# Altium PCB TS1A+继电器.PcbDoc
Units mm, origin at the board's own origin, x right, y up, seen from the top; angles counter-clockwise.
Board outline 54.36 x 30 mm, 2 copper layers (Top Layer, Bottom Layer); 34 components, 18 nets, 73 pads, 31 vias.
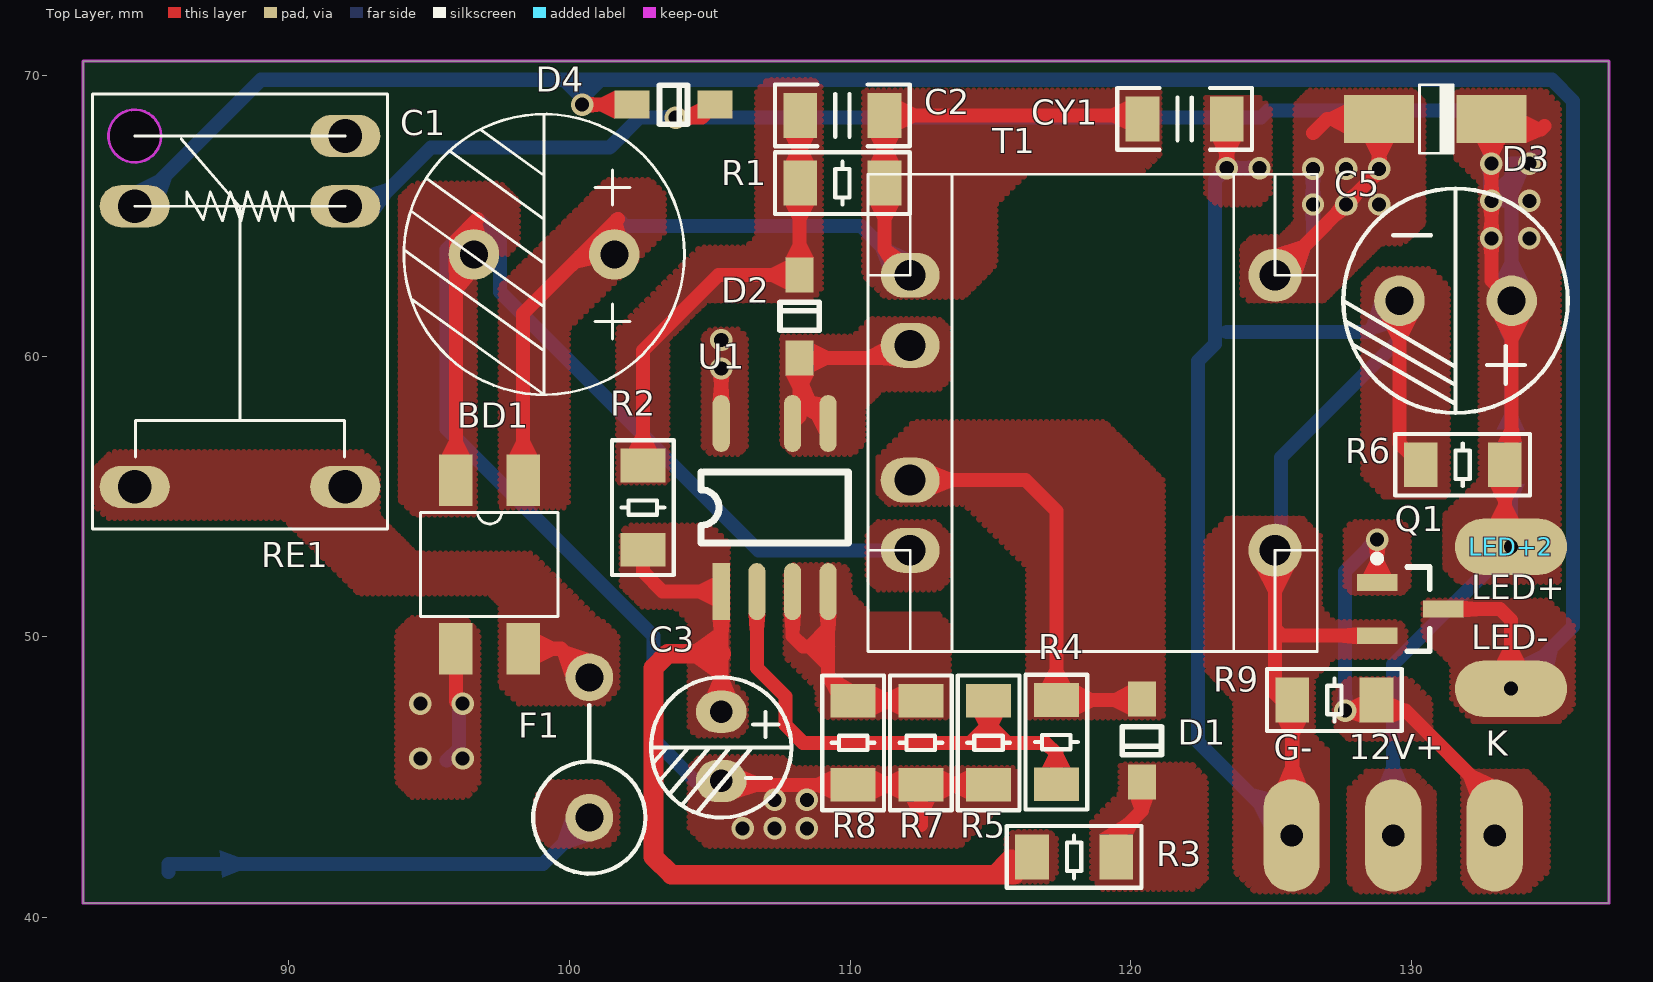
[diagram p0: Top Layer view]
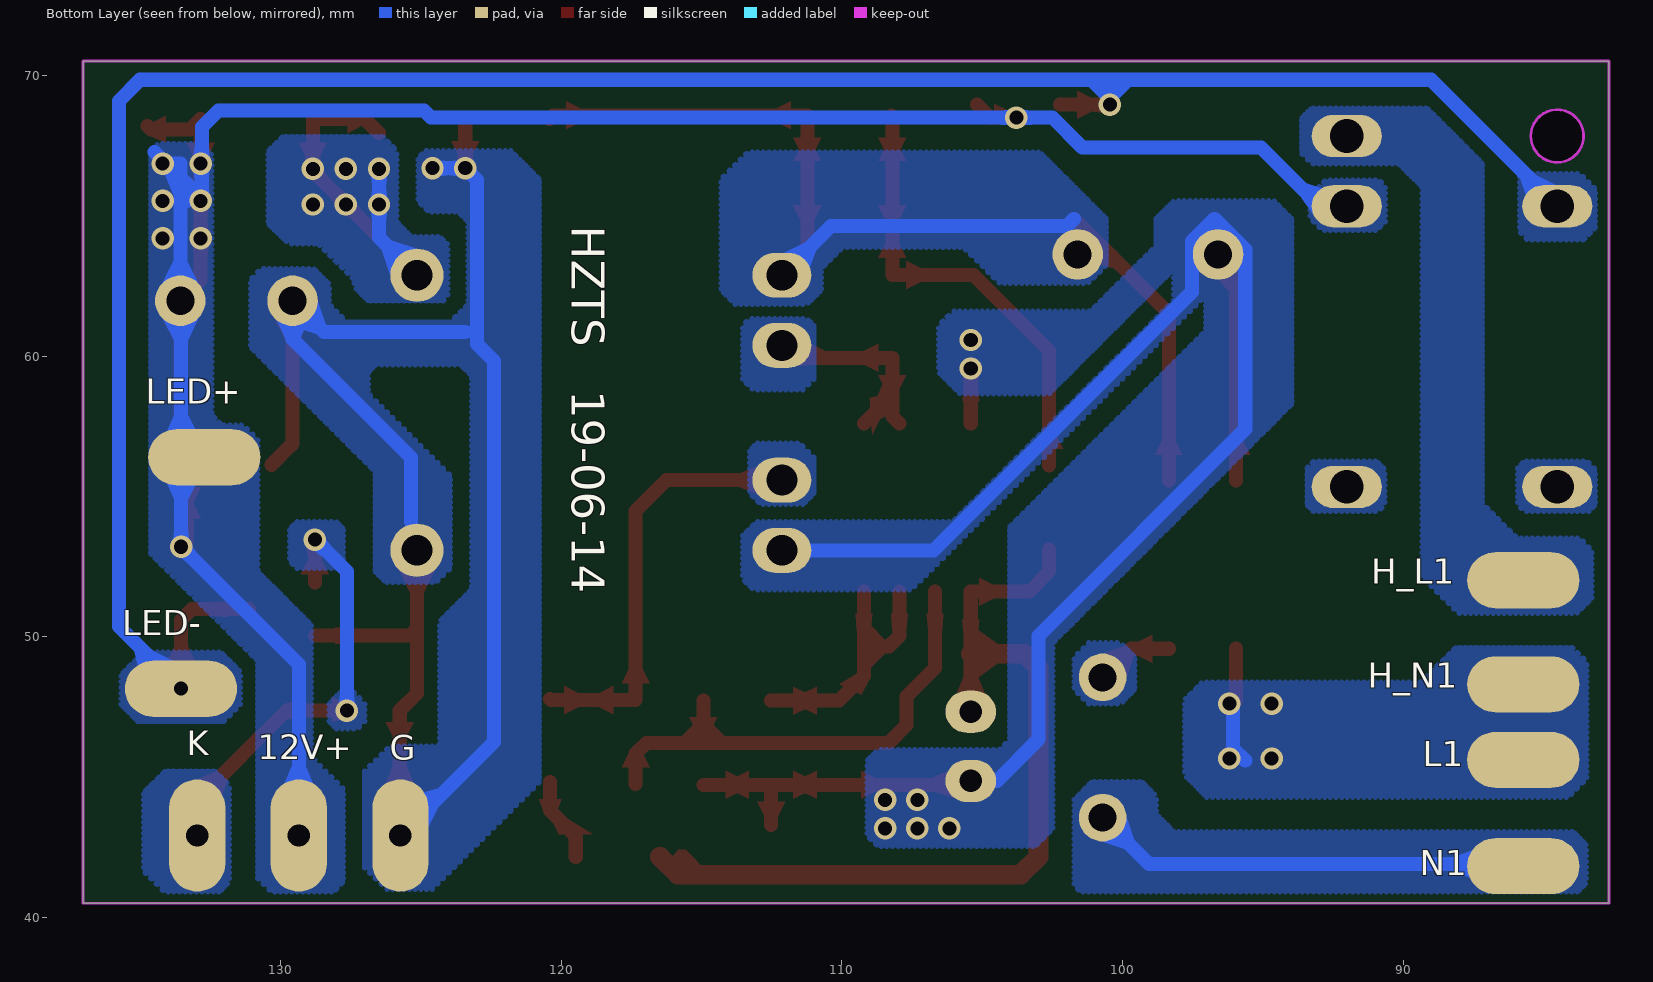
[diagram p1: Bottom Layer view, seen from below]

## Layer stack, top to bottom
Top Solder: solder mask 0.0102, Solder Resist, Dk 3.5
Top Layer: signal copper 0.0356
Dielectric 1: dielectric 0.32, FR-4, Dk 4.8
Bottom Layer: signal copper 0.0356
Bottom Solder: solder mask 0.0102, Solder Resist, Dk 3.5

## Board outline
82.677,40.513 82.677,70.513 137.033,70.513 137.033,40.513
cut-out: 83.578,67.845 ccw(c84.518,67.845) 84.518,66.905 ccw(c84.518,67.845) 85.458,67.845 ccw(c84.518,67.845) 84.518,68.785 ccw(c84.518,67.845)

## Design rules (kind name [scope] priority, off if disabled: settings)
Clearance [All] p1: gap=0.254 ignorepadtopadclearanceinfootprint=FALSE except(0: Arc-Hole Track-Hole SMDPad-Hole THPad-Hole Via-Hole Fill-Hole Poly-Hole Region-Hole Text-Hole)
PolygonConnect [All] p1: connectstyle=Direct reliefconductorwidth=0.254 reliefentries=4 polygonreliefangle="90 Angle" airgapwidth=0.254
RoutingVias [All] p1: holewidth=0.711 width=1.27 viastyle="Through Hole" minholewidth=0.711 minwidth=1.27 maxholewidth=0.711 maxwidth=1.27
SolderMaskExpansion [All] p1: expansion=0.102
Width [All] p1: maxlimit=1 minlimit=0.5 preferedwidth=0.5
30 further rules are at their usual default settings.

## Components (designator, comment, footprint, x,y, rotation, side; value= is the part's Value field where it differs from the comment)
12V+ "Welding-hole" PAD#1 129.35,42.926 r90 top
BD1 "Bridge2" MBL10S 97.155,52.578 r180 top
C1 "10uF/400V" "400V/10uF 直插电解电容" 101.6,63.627 r180 top value=?
C2 "Cap" C1206 109.728,68.58 r0 top value=?
C3 "10uF/50V" 50V/10uF 105.41,46.101 r0 top value=?
C5 "1000uF/16V" 16V/680uF 131.572,61.976 r180 top locked value=?
CY1 "Cap" C1206 121.92,68.453 r0 top value=?
D1 "Diode" SOD123 120.396,47.781 r90 top
D2 "Diode" SOD123 108.204,59.944 r270 top
D3 "SS310/SMA" SMA 132.849,68.453 r180 top
D4 "FR107" SOD123 102.235,68.961 r180 top
F1 "Fuse 1" FUSE 100.711,46.061 r90 top
G- "Welding-hole" PAD#1 125.73,42.926 r90 top
H_L1 "Welding-hole" PAD#2 85.725,52.019 r180 bottom
H_N1 "Welding-hole" PAD#2 85.725,48.311 r180 bottom
K "Welding-hole" PAD#1 132.969,42.926 r270 top (schematic designator LED_K1)
L1 "Welding-hole" PAD#2 85.725,45.618 r0 bottom
LED+ "Welding-hole" PAD#2 132.715,56.4 r180 bottom
LED+2 "Welding-hole" PAD#2 133.545,53.213 r180 top
LED- "Welding-hole" PAD#3 133.545,48.154 r180 bottom
N1 "Welding-hole" PAD#2 85.725,41.834 r180 bottom
Q1 "MOSFET-N" SOT_23_N-MOS 129.953,50.993 r270 top
R1 "120K/1206" R1206 109.728,66.167 r0 top value=1K
R2 "6.8mK/1206" R1206 102.616,54.61 r90 top value=1K
R3 "10R/1206" R1206 117.983,42.164 r0 top value=1K
R4 "20K/1206" R1206 117.348,46.252 r90 top value=1K
R5 "3K/1206" R1206 114.935,46.228 r90 top value=1K
R6 "1.5K/1206" R1206 131.826,56.134 r0 top value=1K
R7 "2R/1206" R1206 112.522,46.228 r270 top value=1K
R8 "2R/1206" R1206 110.109,46.228 r270 top value=1K
R9 "10K" R1206 127.254,47.752 r180 top value=1K
RE1 "RELAY-BSZ6-SS-112L" HKE_HRS1_DC12v 88.265,61.595 r90 top
T1 "TRANS" TRANS_1A 125.141,62.886 r0 top locked
U1 "?" SOP-7 107.315,54.61 r90 top

## Footprints (in the part's own frame and the unit in brackets; to place one, negate y for a bottom-side part, rotate by r counter-clockwise, add the part's x,y. Pads: shape width x height; smd on the part's side, far side on the other; paste and mask are expansions set on the pad)
16V/680uF [mm]
  round 1.8 hole 1: 1(-2,0) 2(2,0)
  silkscreen extent -4,-4 4,4
50V/10uF [mm]
  oval 1.8x1.5 hole 0.8: 1(0,1.232) 2(0,-1.232)
  silkscreen extent -2.5,-2.54 2.5,2.46
"400V/10uF 直插电解电容" [mm]
  round 1.8 hole 1: 1(0,0) 2(5,0)
  silkscreen extent -2.5,-5 7.5,5
C1206 [mm]
  rect 1.2x1.6 smd: 1(-1.5,0) 2(1.5,0)
  silkscreen extent -2.4,-1.1 2.4,1.1
FUSE [mm]
  round 1.7 hole 1: 1(-2.5,0) 2(2.5,0)
  silkscreen extent -4.5,-2 1.51,2
HKE_HRS1_DC12v [mm]
  oval 1.5x2.5 hole 1.2: 1(-6.25,-3.75) 2(3.75,-3.75) 3(6.25,-3.75) 5(3.75,3.75) 6(-6.25,3.75)
  Keep-Out Layer board cut-out: 5.314,3.747 5.386,3.389 5.588,3.085 5.892,2.882 6.25,2.811 6.25,2.811 6.608,2.882 6.912,3.085 7.114,3.389 7.186,3.747 7.186,3.747 7.114,4.105 6.912,4.408 6.608,4.611 6.25,4.682 6.25,4.682 5.892,4.611 5.588,4.408 5.386,4.105 5.314,3.747
  silkscreen extent -7.75,-5.25 7.75,5.25
MBL10S [mm]
  rect 1.2x1.84 smd: 1(-1.2,-3) 2(-1.2,3) 3(1.2,-3) 4(1.2,3)
  silkscreen extent -2.44,-1.85 2.46,1.85
PAD#1 [mm]
  oval 4x2 hole 0.8: 1(0,0)
PAD#2 [mm]
  oval 4x2 smd: 1(0,0)
PAD#3 [mm]
  oval 4x2 all layers, no hole: 1(0,0)
R1206 [mm]
  rect 1.2x1.6 smd: 1(-1.5,0) 2(1.5,0)
  silkscreen extent -2.4,-1.1 2.4,1.1
SMA [mm]
  rect 2.5x1.7 smd: 1(4,0) 2(0,0)
  silkscreen extent 1.37,-1.22 2.57,1.22
SOD123 [mm]
  rect 1.25x1 smd: 1(0,0) 2(-2.95,0)
  silkscreen extent -1.98,-0.7 -0.98,0.7, body extent -3.37,-0.85 0.38,0.85, height 1.2
SOP-7 [mil]
  rect 80x24 smd: 1(-117.87,75)
  oval 80x24 smd: 2(-117.87,25) 3(-117.87,-25) 4(-117.87,-75) 5(117.87,-75) 6(117.87,-25) 7(117.87,75)
  silkscreen extent -50,-103 50,103, body extent -118,-96 118,96, height 67
SOT_23_N-MOS [mm]
  rect 0.6x1.45 smd: 1(0,1.175) 2(-0.95,-1.175) 3(0.95,-1.175)
  silkscreen extent -1.92,-1.3 1.5,0.7, body extent -1.5,-0.7 1.5,0.7, height 1.1
TRANS_1A [mm]
  oval 2.1x1.6 hole 1.1: 1(-13,0) 2(-13,-2.5) 3(-13,-7.3) 4(-13,-9.8)
  round 1.9 hole 1.1: 5(0,-9.8) 6(0,0)
  silkscreen extent -14.5,-13.4 1.5,3.6

## Part data
12V+ G- H_L1 H_N1 K L1 LED+ LED+2 LED- N1: "焊接点"
BD1: "Diode Bridge", LatestRevisionDate=17-Jul-2002, LatestRevisionNote="Re-released for DXP Platform.", PackageDescription="Bridge Rectifier; 4 Terminals; Body 16.8 x 16.8 mm (typ); Pitch 10.67 mm", PackageReference=D-46_6A, Published=24-Mar-1999, Publisher="Altium Limited"
C1 C3 C5: library part "Cap Pol1", "直插电解电容15uF/400V", LatestRevisionDate=17-Jul-2002, LatestRevisionNote="Re-released for DXP Platform.", PackageDescription="Polarized Capacitor (Radial); 2 Leads", PackageReference=RB7.6-15, Published=8-Jun-2000, Publisher="Altium Limited"
C2 CY1: "Capacitor", LatestRevisionDate=17-Jul-2002, LatestRevisionNote="Re-released for DXP Platform.", PackageDescription="Radial Cap, Thru-Hole; 2 Leads; 0.3 in Pin Spacing", PackageReference=RAD-0.3, Published=8-Jun-2000, Publisher="Altium Limited"
D1 D2: "Default Diode", Code_JEDEC=DO-214-AB, LatestRevisionDate=17-Jul-2002, LatestRevisionNote="Re-released for DXP Platform.", PackageDescription="DO-214-AB/SMC; 2 C-Bend Leads; Body 7.9 x 5.9 mm, inc. leads (LxW)", PackageReference=SMC, PackageVersion=Sep-1996, Published=8-Jun-2000, Publisher="Altium Limited"
D3: library part Diode, Code_JEDEC=DO-214-AB, LatestRevisionDate=17-Jul-2002, LatestRevisionNote="Re-released for DXP Platform.", PackageDescription="DO-214-AB/SMC; 2 C-Bend Leads; Body 7.9 x 5.9 mm, inc. leads (LxW)", PackageReference=SMC, PackageVersion=Sep-1996, Published=8-Jun-2000, Publisher="Altium Limited"
D4: library part Diode, "Default Diode", Code_JEDEC=DO-214-AB, LatestRevisionDate=17-Jul-2002, LatestRevisionNote="Re-released for DXP Platform.", PackageDescription="DO-214-AB/SMC; 2 C-Bend Leads; Body 7.9 x 5.9 mm, inc. leads (LxW)", PackageReference=SMC, PackageVersion=Sep-1996, Published=8-Jun-2000, Publisher="Altium Limited"
F1: "保险丝", LatestRevisionDate=17-Jul-2002, LatestRevisionNote="Re-released for DXP Platform.", PackageDescription="Thru-Hole; 2 Leads", PackageReference=PIN-W2/E2.8, Published=8-Jun-2000, Publisher="Altium Limited"
Q1: "N-Channel MOSFET", LatestRevisionDate=17-Jul-2002, LatestRevisionNote="Re-released for DXP Platform.", PackageDescription="TO, Flat Index; 3 In-Line, Axial Leads; Body Dia. 4.6mm; Lead Dia. 0.5 mm (max)", PackageReference=E3, PackageVersion=1995/1996, Published=8-Jun-2000, Publisher="Altium Limited"
R1 R2 R3 R4 R5 R6 R7 R8 R9: library part Res2, "Resistor", LatestRevisionDate=17-Jul-2002, LatestRevisionNote="Re-released for DXP Platform.", PackageDescription="Axial Device, Thru-Hole; 2 Leads; 0.4 in Pin Spacing", PackageReference=AXIAL-0.4, Published=8-Jun-2000, Publisher="Altium Limited"
RE1: library part RELAY-6P, "RELAY-6P"
T1: "变压器"
U1: library part Component_1

## Via types
v1: diameter 0.8, hole 0.5, Top Layer to Bottom Layer, tented both sides, 31 vias

## Nets (pads, with @x,y where several pads share a name; then routed paths per layer and width w, separated by ;. In a path a pad name is that pad's centre, name@x,y a point inside that pad or via, vN(x,y) a via of type N, cw(c..) or ccw(c..) an arc to the next point about the centre after c; other vN are vias at no path point)
12V: 12V+.1 C5.1 D3.2 D4.2 LED+2.1 LED+.1 R6.2 RE1.2 | length 93.1
  Top Layer w0.5: v1(103.784,68.504) 104.728,68.504 D4.2 ; v1(133.545,53.213) 133.326,53.432 R6.2 133.572,56.38 C5.1 132.849,62.699 v1(132.849,64.2) v1(132.849,65.533) v1(132.849,66.865) D3.2 133.23,68.072 134.62,68.072 134.747,68.199
  Bottom Layer w0.5: RE1.2 92.98,65.345 95.072,67.437 101.437,67.437 102.504,68.504 v1(103.784,68.504) 124.638,68.504 124.892,68.758 132.207,68.758 132.8,68.165 132.8,65.596 133.572,66.368 ; 12V+.1 129.35,49.017 v1(133.545,53.213) 133.545,61.949 C5.1 133.572,66.368 ; v1(134.2,66.865) v1@134.2,66.996 ; 134.484,67.28 v1@134.2,66.996 ; 133.572,66.368 v1@134.07,66.865 ; 133.572,66.368 133.572,66.865 v1@134.07,66.865 ; v1@134.07,66.865 v1@134.2,66.996
  other v1: 134.2,64.2 134.2,65.533
AGND: BD1.3 C1.2 C3.2 R5.1 R7.2 R8.2 T1.4 U1.7 | length 69.1
  Top Layer w0.5: BD1.3 95.955,64.125 96.727,64.897 ; C3.2@105.41,44.996 105.678,44.728 108.458,44.728 R8.2 R7.2 ; U1.7 v1(105.41,59.563) ; 112.522,43.307 R7.2 ; R5.1 R7.2
  Bottom Layer w0.5: C3.2 104.483,44.869 102.997,46.355 102.997,50.038 95.631,57.404 95.631,63.801 96.727,64.897 97.536,64.088 97.536,62.289 106.739,53.086 T1.4
  other v1: 106.172,43.18 107.315,43.18 108.458,43.18 107.315,44.196 108.458,44.196 105.41,60.579
GND: C5.2 CY1.2 G-.1 Q1.3 R6.1 R9.2 T1.5 | length 65.1
  Top Layer w0.5: v1(123.42,66.699) CY1.2 ; T1.5 125.141,50.292 ; G-.1 125.754,42.95 125.754,47.371 125.141,47.984 125.141,50.292 ; Q1.3 125.39,50.043 125.141,50.292 ; C5.2 129.572,56.888 R6.1
  Bottom Layer w0.5: 123.42,60.857 128.453,60.857 C5.2 129.572,60.611 125.349,56.388 125.349,54.102 ; v1(124.587,66.699) v1(123.42,66.699) 123,66.279 123,60.437 122.4,59.837 122.4,46.256 G-.1
H_C: D4.1 LED-.1 Q1.1 RE1.5 | length 83
  Top Layer w0.5: v1(100.457,68.961) D4.1 ; Q1.1 133.157,50.993 133.545,50.605 v1(133.545,48.154)
  Bottom Layer w0.5: RE1.5 89.02,69.85 100.457,69.85 ; v1(100.457,68.961) 100.457,69.85 ; v1(133.545,48.154) 135.763,50.372 135.763,69.088 135.001,69.85 100.457,69.85
NetBD1_1: BD1.1 C1.1 C2.2 CY1.1 R1.2 T1.1 | length 37.3
  Top Layer w0.5: BD1.1 98.355,61.525 101.727,64.897 ; T1.1 111.228,63.799 R1.2 C2.2 120.293,68.58 CY1.1
  Bottom Layer w0.5: 101.727,64.897 101.981,64.643 110.384,64.643 T1.1
NetBD1_2: BD1.2 F1.2 RE1.1 RE1.6 | length 2.8
  Top Layer w0.5: BD1.2 99.694,49.578 F1.2
NetC2_1: C2.1 D2.2 R1.1 R2.2 | length 16.5
  Top Layer w0.5: R2.2 102.616,60.198 105.312,62.894 D2.2 108.204,68.556 C2.1
NetC3_1: C3.1 R2.1 R3.1 U1.1 | length 30.9
  Top Layer w0.5: R2.1 102.616,52.324 103.324,51.616 U1.1 105.41,49.403 C3.1@105.41,47.968
  Top Layer w0.7: 105.41,49.403 103.505,49.403 102.997,48.895 102.997,42.164 103.632,41.529 115.848,41.529 R3.1
NetD1_1: D1.1 R4.2 T1.3 | length 15.5
  Top Layer w0.5: T1.3 116.245,55.586 117.348,54.483 R4.2 120.367,47.752 D1.1
NetD1_2: D1.2 R3.2 | length 3
  Top Layer w0.5: R3.2 119.483,42.902 120.396,43.815 D1.2
NetD2_1: D2.1 T1.2 U1.5 U1.6 | length 8
  Top Layer w0.5: U1.6 108.204,57.858 108.204,58.62 ; U1.5 108.204,58.62 ; T1.2 111.699,59.944 D2.1 108.204,58.62
NetD3_1: D3.1 T1.6 | length 14
  Top Layer w0.5: T1.6 128.849,66.594 D3.1 127,68.453 126.492,67.945
  Bottom Layer w0.5: T1.6 126.492,64.237 v1(126.492,65.405) v1(126.492,66.675)
  other v1: 127.67,65.405 128.849,65.405 127.67,66.675 128.849,66.675
NetH_L1_1: H_L1.1 RE1.3
NetLED_K1_1: K.1 Q1.2 R9.1 | length 16
  Top Layer w0.5: v1(127.635,47.371) 128.754,47.371 129.794,47.371 132.969,44.196 K.1 ; Q1.2 v1(128.778,53.467)
  Bottom Layer w0.5: v1(127.635,47.371) 127.635,52.324 v1(128.778,53.467)
NetR4_1: R4.1 R5.2 U1.2 | length 17.8
  Top Layer w0.5: U1.2 106.68,48.895 107.696,47.879 107.696,46.863 108.331,46.228 114.935,46.228 ; R5.2 114.935,46.228 ; R4.1 117.348,45.847 116.967,46.228 114.935,46.228
NetR7_1: R7.1 R8.1 U1.3 U1.4 | length 9.7
  Top Layer w0.5: U1.3 107.95,50.038 108.331,49.657 109.22,49.657 ; U1.4 109.22,49.657 ; R7.1 R8.1 109.22,48.617 109.22,49.657
~220L: BD1.4 H_N1.1 L1.1 | length 4.2
  Top Layer w0.5: BD1.4 95.955,47.708 v1@96.063,47.6
  Bottom Layer w0.5: 95.631,45.593 96.063,46.025 v1@96.063,47.6
  other v1: 94.691,45.669 96.2,45.669 94.691,47.625 96.2,47.625
~220N: F1.1 N1.1 | length 15.9
  Bottom Layer w0.5: N1.1@85.725,41.631 N1.1 85.725,41.91 95.6,41.91 ; 95.631,41.91 99.06,41.91 F1.1

## Polygon pours and split planes (outlines as drawn)
no net on Top Layer "NONET_L01_P-001" (hatched 90Degree grid 0.2 track 0.2, remove dead copper, pour order 0): 93.599,50.927
no net on Top Layer "NONET_L01_P-001" (hatched 90Degree grid 0.2 track 0.2, remove dead copper, pour order 2): 96.266,51.054
~220L on Top Layer "NONET_L01_P-001" (hatched 90Degree grid 0.2 track 0.2, remove dead copper, pour order 4): 93.853,50.165 93.853,44.831 94.386,44.298 96.346,44.298 96.774,44.726 96.774,50.165 96.266,50.673 94.361,50.673
NetBD1_2 on Top Layer "NONET_L01_P-001" (hatched 90Degree grid 0.2 track 0.2, remove dead copper, pour order 10): 98.171,47.625 101.219,47.625 101.727,48.133 101.727,50.038 101.219,50.546 97.79,50.546 97.536,50.292 97.536,48.26
~220N on Top Layer "NONET_L01_P-001" (hatched 90Degree grid 0.2 track 0.2, remove dead copper, pour order 16): 98.806,44.323 98.806,43.053 99.314,42.545 101.346,42.545 101.727,42.926 101.727,44.196 101.092,44.831 99.314,44.831
AGND on Top Layer "NONET_L01_P-001" (hatched 90Degree grid 0.2 track 0.2, remove dead copper, pour order 18): 93.98,54.864 93.98,65.659 94.488,66.167 97.536,66.167 98.171,65.532 98.171,64.008 97.79,63.627 97.155,63.627 96.647,63.119 96.647,54.356 94.488,54.356
NetBD1_1 on Top Layer "NONET_L01_P-001" (hatched 90Degree grid 0.2 track 0.2, remove dead copper, pour order 20): 99.949,54.61 99.949,60.96 102.743,63.754 103.378,64.389 103.378,65.786 102.87,66.294 101.346,66.294 98.552,63.5 97.79,62.738 97.536,62.484 97.536,54.61
NetBD1_1 on Top Layer "NONET_L01_P-001" (hatched 90Degree grid 0.2 track 0.2, remove dead copper, pour order 24): 110.49,69.469 110.49,62.865 111.252,62.103 114.046,62.103 115.189,63.246 115.189,65.405 116.332,66.548 120.396,66.548 121.031,67.183 121.031,69.469
NetD2_1 on Top Layer "NONET_L01_P-001" (hatched 90Degree grid 0.2 track 0.2, remove dead copper, pour order 26): 107.569,56.896 107.569,60.706 110.109,60.706 110.744,61.341 113.157,61.341 113.538,60.96 113.538,59.182 113.157,58.801 111.125,58.801 110.49,58.166 110.49,56.896 110.109,56.515 107.95,56.515
AGND on Top Layer "NONET_L01_P-001" (hatched 90Degree grid 0.2 track 0.2, remove dead copper, pour order 28): 106.299,56.769 106.299,60.706 106.045,60.96 105.029,60.96 104.775,60.706 104.775,56.769 105.029,56.515 106.045,56.515
NetC3_1 on Top Layer "NONET_L01_P-001" (hatched 90Degree grid 0.2 track 0.2, remove dead copper, pour order 34): 102.108,53.975 105.029,53.975 105.664,53.34 105.664,48.514 105.918,48.26 106.299,47.879 106.299,46.736 106.045,46.482 104.521,46.482 104.267,46.736 104.267,50.546 103.759,51.054 102.616,51.054 101.854,51.816 101.854,53.721
AGND on Top Layer "NONET_L01_P-001" (hatched 90Degree grid 0.2 track 0.2, remove dead copper, pour order 36): 104.902,42.545 113.919,42.545 114.554,43.18 115.316,43.942 115.951,43.942 115.951,45.339 107.95,45.339 107.569,45.72 104.648,45.72 104.267,45.339 104.267,43.18
NetR7_1 on Top Layer "NONET_L01_P-001" (hatched 90Degree grid 0.2 track 0.2, remove dead copper, pour order 38): 107.95,52.578 109.728,52.578 109.982,52.324 109.982,51.562 110.744,50.8 113.157,50.8 113.538,50.419 113.538,47.117 109.22,47.117 108.839,47.498 108.839,48.133 107.696,49.276 107.696,52.324
AGND on Top Layer "NONET_L01_P-001" (hatched 90Degree grid 0.2 track 0.2, remove dead copper, pour order 40): 110.617,53.721 110.617,52.07 110.998,51.689 113.157,51.689 113.538,52.07 113.538,53.594 113.03,54.102 110.998,54.102
NetD1_1 on Top Layer "NONET_L01_P-001" (hatched 90Degree grid 0.2 track 0.2, remove dead copper, pour order 42): 111.379,54.737 114.046,54.737 116.332,52.451 116.332,47.117 121.158,47.117 121.158,49.403 121.158,55.573 119.073,57.658 112.268,57.658 110.998,56.388 110.998,55.118
NetD1_2 on Top Layer "NONET_L01_P-001" (hatched 90Degree grid 0.2 track 0.2, remove dead copper, pour order 44): 119.634,45.466 122.174,45.466 122.682,44.958 122.682,41.402 122.301,41.021 118.999,41.021 118.618,41.402 118.618,43.434 119.634,44.45
GND on Top Layer "NONET_L01_P-001" (hatched 90Degree grid 0.2 track 0.2, remove dead copper, pour order 46): 122.682,69.215 124.587,69.215 124.968,68.834 124.968,65.786 124.587,65.405 123.063,65.405 122.682,65.786
NetD3_1 on Top Layer "NONET_L01_P-001" (hatched 90Degree grid 0.2 track 0.2, remove dead copper, pour order 52): 130.048,69.469 126.365,69.469 125.857,68.961 125.857,64.77 125.349,64.262 124.333,64.262 123.952,63.881 123.952,62.23 124.206,61.976 126.873,61.976 127.254,62.357 128.905,64.008 129.713,64.008 130.429,64.724 130.429,69.088
12V on Top Layer "NONET_L01_P-001" (hatched 90Degree grid 0.2 track 0.2, remove dead copper, pour order 56): 131.699,69.469 134.747,69.469 135.255,68.961 135.255,51.943 132.461,51.943 131.699,51.943 131.191,52.451 131.191,54.356 132.461,55.626 132.461,66.167 131.572,67.056 131.572,69.342
NetLED_K1_1 on Top Layer "NONET_L01_P-001" (hatched 90Degree grid 0.2 track 0.2, remove dead copper, pour order 60): 131.826,45.212 131.826,41.275 132.207,40.894 134.112,40.894 134.874,41.656 134.874,44.45 134.112,45.212
GND on Top Layer "NONET_L01_P-001" (hatched 90Degree grid 0.2 track 0.2, remove dead copper, pour order 62): 129.032,54.991 131.318,54.991 131.318,62.484 130.683,63.119 128.824,63.119 128.27,62.565 128.27,55.753
NetLED_K1_1 on Top Layer "NONET_L01_P-001" (hatched 90Degree grid 0.2 track 0.2, remove dead copper, pour order 64): 127.889,51.562 129.667,51.562 129.921,51.816 129.921,53.848 129.667,54.102 127.889,54.102 127.635,53.848 127.635,51.816
NetLED_K1_1 on Top Layer "NONET_L01_P-001" (hatched 90Degree grid 0.2 track 0.2, remove dead copper, pour order 66): 127.762,46.355 130.683,46.355 130.683,47.752 129.921,48.514 127.762,48.514 127.254,48.006 127.254,46.863
GND on Top Layer "NONET_L01_P-001" (hatched 90Degree grid 0.2 track 0.2, remove dead copper, pour order 68): 126.111,54.229 123.444,54.229 122.682,53.467 122.682,48.844 123.698,47.747 123.698,41.656 124.46,40.894 126.619,40.894 127,41.275 127,45.974 126.492,46.482 126.492,48.514 127.254,49.276 129.413,49.276 129.794,49.657 129.794,50.292 129.54,50.546 127.254,50.546 126.746,51.054 126.746,53.594
NetC3_1 on Top Layer "NONET_L01_P-001" (hatched 90Degree grid 0.2 track 0.2, remove dead copper, pour order 76): 115.57,41.275 117.094,41.275 117.348,41.529 117.348,42.799 117.094,43.053 115.824,43.053 115.57,42.799
12V on Top Layer "NONET_L01_P-001" (hatched 90Degree grid 0.2 track 0.2, remove dead copper, pour order 82): 127.762,44.577 127.762,41.275 128.143,40.894 130.302,40.894 130.81,41.402 130.81,44.45 130.048,45.212 128.397,45.212
NetC2_1 on Top Layer "NONET_L01_P-001" (hatched 90Degree grid 0.2 track 0.2, remove dead copper, pour order 22): 101.727,55.499 101.727,60.96 104.648,63.881 106.299,63.881 106.68,64.262 106.68,69.469 107.061,69.85 108.712,69.85 108.966,69.596 108.966,62.357 108.585,61.976 104.902,61.976 103.505,60.579 103.505,55.499
H_C on Top Layer "NONET_L01_P-001" (hatched 90Degree grid 0.2 track 0.2, remove dead copper, pour order 74): 130.429,50.038 131.445,49.022 131.445,47.752 132.207,46.99 135.255,46.99 135.763,47.498 135.763,50.419 134.874,51.308 130.429,51.308
NetBD1_2 on Top Layer "NONET_L01_P-001" (hatched 90Degree grid 0.2 track 0.2, remove dead copper, pour order 94): 83.541,54.229 89.814,54.229 90.526,53.518 92.507,51.537 97.155,51.537 97.536,51.156 97.536,50.368 101.27,50.368 98.654,52.984 94.513,52.984 93.193,54.305 93.193,56.058 92.659,56.591 83.693,56.591 83.058,55.956 83.058,54.712
no net on Bottom Layer "NONET_L01_P-001" (hatched 90Degree grid 0.2 track 0.2, remove dead copper, pour order 6): 93.599,47.879
~220L on Bottom Layer "NONET_L01_P-001" (hatched 90Degree grid 0.2 track 0.2, remove dead copper, pour order 8): 94.361,48.387 97.155,48.387 97.79,47.752 97.79,45.085 97.003,44.298 94.386,44.298 93.726,44.958 93.726,47.752
~220N on Bottom Layer "NONET_L01_P-001" (hatched 90Degree grid 0.2 track 0.2, remove dead copper, pour order 12): 93.599,40.767 101.346,40.767 101.727,41.148 101.727,44.196 101.092,44.831 99.314,44.831 98.806,44.323 98.806,43.688 98.171,43.053 93.853,43.053 93.599,42.799
NetBD1_2 on Bottom Layer "NONET_L01_P-001" (hatched 90Degree grid 0.2 track 0.2, remove dead copper, pour order 14): 101.219,47.625 100.076,47.625 99.568,48.133 99.568,49.276 100.076,49.784 101.219,49.784 101.727,49.276 101.727,48.133
AGND on Bottom Layer "NONET_L01_P-001" (hatched 90Degree grid 0.2 track 0.2, remove dead copper, pour order 32): 98.806,64.897 98.806,63.932 101.143,61.595 106.045,61.595 106.553,61.087 106.553,59.436 105.791,58.674 102.616,58.674 98.171,63.119 98.171,61.976 106.045,54.102 113.03,54.102 113.538,53.594 113.538,52.07 113.157,51.689 107.518,51.689 97.028,62.179 97.028,60.909 104.013,53.924 104.013,46.355 104.394,45.974 108.712,45.974 109.093,45.593 109.093,42.926 108.712,42.545 103.124,42.545 102.489,43.18 102.489,49.784 93.98,58.293 93.98,64.897 94.615,65.532 98.171,65.532
GND on Bottom Layer "NONET_L01_P-001" (hatched 90Degree grid 0.2 track 0.2, remove dead copper, pour order 48): 121.793,67.31 124.841,67.31 125.095,67.056 125.095,65.532 124.714,65.151 123.674,65.151 123.317,64.794 123.317,61.849 123.952,61.214 127.635,61.214 128.27,61.849 128.27,62.565 128.824,63.119 130.683,63.119 131.064,62.738 131.064,60.325 126.619,55.88 126.619,52.324 126.238,51.943 124.46,51.943 123.952,52.451 123.952,55.753 126.873,58.674 126.873,59.436 126.619,59.69 123.571,59.69 123.19,59.309 123.19,51.689 124.333,50.546 124.333,46.101 126.111,46.101 127,45.212 127,41.783 126.238,41.021 124.587,41.021 123.698,41.91 120.777,44.831 120.777,66.294
12V on Bottom Layer "NONET_L01_P-001" (hatched 90Degree grid 0.2 track 0.2, remove dead copper, pour order 54): 134.62,52.959 134.62,67.31 134.366,67.564 132.842,67.564 132.461,67.183 132.461,57.912 132.08,57.531 131.318,57.531 130.81,57.023 130.81,54.102 130.81,52.324 128.905,50.419 128.905,45.72 127.762,44.577 127.762,41.275 128.143,40.894 130.302,40.894 130.81,41.402 130.81,49.149
NetLED_K1_1 on Bottom Layer "NONET_L01_P-001" (hatched 90Degree grid 0.2 track 0.2, remove dead copper, pour order 58): 131.826,44.704 131.826,41.275 132.207,40.894 134.112,40.894 134.874,41.656 134.874,44.45 134.112,45.212 132.334,45.212
NetLED_K1_1 on Bottom Layer "NONET_L01_P-001" (hatched 90Degree grid 0.2 track 0.2, remove dead copper, pour order 70): 128.016,54.102 129.413,54.102 129.667,53.848 129.667,52.705 129.413,52.451 127.762,52.451 127.762,53.848
NetLED_K1_1 on Bottom Layer "NONET_L01_P-001" (hatched 90Degree grid 0.2 track 0.2, remove dead copper, pour order 72): 127,47.625 127,46.99 127.254,46.736 128.016,46.736 128.27,46.99 128.27,47.625 127.762,48.133 127.508,48.133
NetD2_1 on Bottom Layer "NONET_L01_P-001" (hatched 90Degree grid 0.2 track 0.2, remove dead copper, pour order 78): 110.998,61.087 110.998,59.182 111.379,58.801 113.157,58.801 113.538,59.182 113.538,61.087 113.284,61.341 111.252,61.341
NetD1_1 on Bottom Layer "NONET_L01_P-001" (hatched 90Degree grid 0.2 track 0.2, remove dead copper, pour order 80): 110.998,56.388 110.998,55.118 111.379,54.737 112.903,54.737 113.284,55.118 113.284,56.642 113.03,56.896 111.506,56.896
NetBD1_1 on Bottom Layer "NONET_L01_P-001" (hatched 90Degree grid 0.2 track 0.2, remove dead copper, pour order 30): 101.219,62.611 104.394,62.611 105.664,63.881 109.982,63.881 110.744,63.119 110.744,62.357 111.252,61.849 113.792,61.849 114.3,62.357 114.3,66.317 113.35,67.267 102.954,67.267 100.584,64.897 100.584,63.246
H_C on Bottom Layer "NONET_L01_P-001" (hatched 90Degree grid 0.2 track 0.2, remove dead copper, pour order 86): 83.704,66.497 85.852,66.497 85.852,64.429 85.573,64.15 83.591,64.15 83.16,64.582 83.16,65.953
12V on Bottom Layer "NONET_L01_P-001" (hatched 90Degree grid 0.2 track 0.2, remove dead copper, pour order 88): 90.653,66.065 90.653,64.795 90.957,64.491 92.888,64.491 93.32,64.922 93.32,65.71 92.761,66.269 90.856,66.269
NetH_L1_1 on Bottom Layer "NONET_L01_P-001" (hatched 90Degree grid 0.2 track 0.2, remove dead copper, pour order 92): 83.82,50.851 88.036,50.851 89.332,52.146 89.332,66.04 90.145,66.853 93.243,66.853 93.624,67.234 93.624,68.478 93.269,68.834 89.154,68.834 87.198,66.878 87.198,54.762 85.954,53.518 83.718,53.518 83.287,53.086 83.287,51.384
~220L on Bottom Layer "NONET_L01_P-001" (hatched 90Degree grid 0.2 track 0.2, remove dead copper, pour order 96): 84.125,44.298 96.018,44.298 97.2,45.48 97.2,48.028 96.841,48.387 89.357,48.387 88.138,49.606 83.972,49.606 83.464,49.098 83.464,44.958
~220N on Bottom Layer "NONET_L01_P-001" (hatched 90Degree grid 0.2 track 0.2, remove dead copper, pour order 98): 83.797,40.917 94.2,40.917 94.2,43.053 83.947,43.053 83.49,42.596 83.49,41.224
NetBD1_2 on Bottom Layer "NONET_L01_P-001" (hatched 90Degree grid 0.2 track 0.2, remove dead copper, pour order 100): 83.16,55.956 83.16,54.712 83.388,54.483 85.7,54.483 85.928,54.712 85.928,56.007 85.674,56.261 83.464,56.261
NetBD1_2 on Bottom Layer "NONET_L01_P-001" (hatched 90Degree grid 0.2 track 0.2, remove dead copper, pour order 102): 90.66,55.956 90.66,54.712 90.888,54.483 93.2,54.483 93.428,54.712 93.428,56.007 93.174,56.261 90.964,56.261
NetD3_1 on Bottom Layer "NONET_L01_P-001" (hatched 90Degree grid 0.2 track 0.2, remove dead copper, pour order 50): 124.206,61.976 126.873,61.976 127.381,62.484 127.381,62.738 128.651,64.008 129.713,64.008 130.429,64.724 130.429,67.31 129.921,67.818 126.365,67.818 125.857,67.31 125.857,64.77 125.349,64.262 124.333,64.262 124.054,63.983 124.054,62.128
H_C on Bottom Layer "NONET_L01_P-001" (hatched 90Degree grid 0.2 track 0.2, remove dead copper, pour order 104): 132.131,49.454 134.874,49.454 135.665,48.663 135.665,47.578 135.077,46.99 132.029,46.99 131.445,47.574 131.445,48.768

## Keep-outs
Keep-Out Layer:
  circle w0.1: c84.518,67.845 r0.94
  lines w0.1: 82.677,40.513 82.677,70.513 135.283,70.513 137.033,70.513 137.033,40.513 82.677,40.513

## Other copper
Top Layer:
  region net NetC3_1: 115.824,42.418 115.57,42.418 114.808,41.656 116.459,41.656

## Silkscreen, mask and mechanical layers (free items; w line width, h text height)
Top Overlay:
  text "LED+" at 132.127,51.054 h1.5
  text "LED-" at 132.127,49.276 h1.5
Bottom Overlay:
  text "HZTS   19-06-14" at 120.015,64.643 h2 r90
  text "K" at 133.35,45.491 h1.5
  text "12V+" at 130.81,45.355 h1.5
  text "G" at 126.111,45.342 h1.5